# Altium PCB PTx-V2.PcbDoc (part 2 of 2)
Units mil, origin at the board's own origin, x right, y up, seen from the top; angles counter-clockwise.
Board outline 6102.36 x 4488.19 mil, 2 copper layers (Top Layer, Bottom Layer); 123 components, 103 nets, 431 pads, 228 vias.
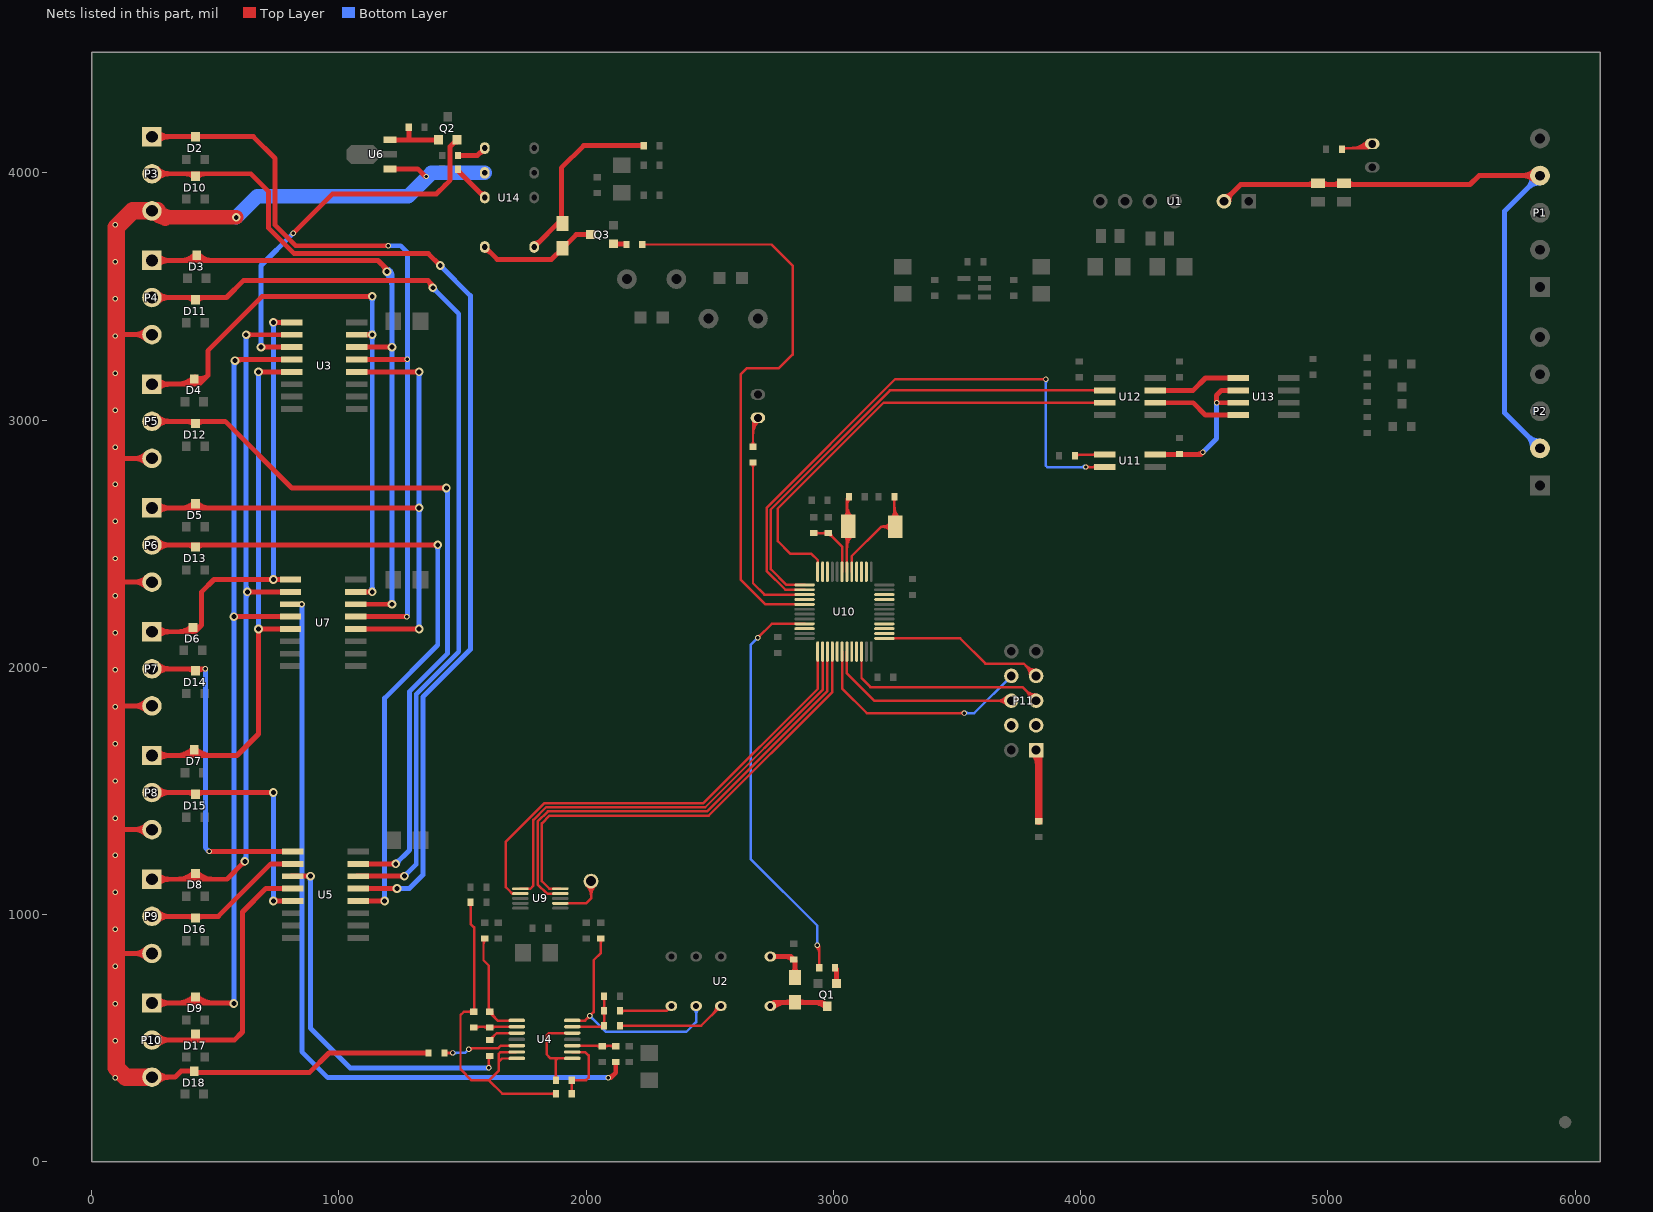
[diagram p2: the nets of this part, all layers, seen from the top]

## Via types
v1: diameter 22, hole 14, Top Layer to Bottom Layer, 185 vias
v2: diameter 35, hole 20, Top Layer to Bottom Layer, 42 vias
v3: diameter 25, hole 15, Top Layer to Bottom Layer, 1 vias

## Nets (pads, with @x,y where several pads share a name; then routed paths per layer and width w, separated by ;. In a path a pad name is that pad's centre, name@x,y a point inside that pad or via, vN(x,y) a via of type N, cw(c..) or ccw(c..) an arc to the next point about the centre after c; other vN are vias at no path point) (continued)
NetC31_1: C31.1 U10.5 XT1.1 | length 711.1
  Top Layer w10: U10.5@3074.53,2386.42 3074.53,2449.53 3194,2569 ; XT1.1@3233.19,2552.14 ccw(c3194,2515.04) 3194,2569 ; XT1.1@3233.19,2585.86 cw(c3194,2622.96) 3194,2569 ; XT1.1@3233.66,2602.09 ccw(c3201.44,2634.31) 3247,2634.31 ; XT1.1@3240.45,2559.01 ccw(c3217.24,2537.04) 3217.24,2569 ccw(c3217.24,2600.96) XT1.1@3240.45,2578.99 ; C31.1@3241.7,2682.2 cw(c3228.89,2669.39) 3247,2669.39 cw(c3265.11,2669.39) C31.1@3252.3,2682.2 ; 3247,2629.48 ccw(c3295.73,2629.48) XT1.1@3261.27,2595.02 ; 3247,2653.62 ccw(c3319.87,2653.62) XT1.1@3268.34,2602.09 ; C31.1@3247,2690 3247,2573 XT1.1@3251,2569 3194,2569
NetC32_1: C32.1 U10.6 XT1.2 | length 634.3
  Top Layer w10: XT1.2@3043.66,2534.94 cw(c3016.65,2507.93) 3054.84,2507.93 ; XT1.2@3043.66,2605.06 ccw(c3016.65,2632.07) 3054.84,2632.07 ; U10.6@3054.84,2386.42 3054.84,2681.84 C32.1@3063,2690 ; 3054.84,2478.2 cw(c3135.08,2478.2) XT1.2@3078.34,2534.94 ; 3054.84,2502.35 cw(c3110.94,2502.35) XT1.2@3071.27,2542.01 ; 3054.84,2637.65 ccw(c3110.94,2637.65) XT1.2@3071.27,2597.99 ; 3054.84,2649.7 cw(c3100.8,2649.7) C32.1@3068.3,2682.2 ; 3054.84,2661.8 ccw(c3135.08,2661.8) XT1.2@3078.34,2605.06 ; 3054.84,2673.84 cw(c3076.66,2673.84) C32.1@3061.23,2689.27
NetD1_A: D1.A Q1.3 U2.12 | length 467.9
  Top Layer w20: U2.12@2745,630 2760,645 D1.A@2845,645 2958.74,645 Q1.3@2975,628.74 ; U2.12@2755.79,623.15 cw(c2808.53,570.41) 2808.53,645 ; D1.A@2834.67,634.67 ccw(c2809.74,609.74) 2809.74,645 ccw(c2809.74,680.26) D1.A@2834.67,655.33 ; D1.A@2855.33,634.67 cw(c2880.26,609.74) 2880.26,645 cw(c2880.26,680.26) D1.A@2855.33,655.33 ; 2919.49,645 cw(c2919.49,574.22) Q1.3@2969.54,624.27
NetD1_K: D1.K R4.1 U2.1 | length 297
  Top Layer w20: U2.1@2745,830 2828,830 R4.1@2840,818 ; U2.1@2755.79,823.15 cw(c2772.32,806.62) 2772.32,830 cw(c2772.32,853.38) U2.1@2755.79,836.85 ; 2802.49,830 cw(c2802.49,782.99) R4.1@2835.73,816.23 ; D1.K@2834.67,760.72 ccw(c2809.74,785.66) 2845,785.66 ccw(c2880.26,785.66) D1.K@2855.33,760.72 ; D1.K@2845,745 R4.1@2845,813
NetD21_A: D21.A Q3.3 U14.12 | length 516.7
  Top Layer w20: U14.12@1590,3686.38 cw(c1590,3653.49) 1613.25,3676.75 ; U14.12@1590,3700 1640,3650 1860,3650 D21.A@1905,3695 1960,3750 Q3.3@2018.74,3750
NetD21_K: D21.K R29.1 U14.1 | length 761.7
  Top Layer w20: U14.1@1790,3700 1900,3810 1900,4020 1990,4110 R29.1@2233,4110 ; U14.1@1790,3713.62 ccw(c1790,3746.51) 1813.25,3723.25
NetLED1_A: LED1.A R21.2 | length 293.1
  Top Layer w10: R21.2@2669.7,2897.3 ccw(c2656.89,2910.11) 2675,2910.11 ccw(c2693.11,2910.11) R21.2@2680.3,2897.3 ; R21.2@2675,2887.76 2675,2988.76 LED1.A@2695,3008.76 ; 2675,2939.28 cw(c2756.61,2939.28) LED1.A@2698.9,2996.98 ; 2675,2963.42 cw(c2732.46,2963.42) LED1.A@2691.83,3004.05 ; 2675,2987.56 cw(c2708.32,2987.56) LED1.A@2684.76,3011.12
NetLED2_A: LED2.A R22.2 | length 330.6
  Top Layer w10: R22.2@5052,4100 5163,4100 LED2.A@5180,4117 ; R22.2@5062.3,4092.2 cw(c5081.14,4073.36) 5081.14,4100 ; 5090.88,4100 ccw(c5090.88,4198.25) LED2.A@5160.35,4128.78 ; 5115.02,4100 ccw(c5115.02,4174.1) LED2.A@5167.42,4121.7 ; 5139.16,4100 ccw(c5139.16,4149.96) LED2.A@5174.49,4114.63
NetQ1_B: Q1.1 R3.2 | length 106.8
  Top Layer w20: R3.2@3005.23,780.73 cw(c2987.92,763.42) 3012.4,763.42 ; Q1.1@3006.95,727.7 ccw(c2993.77,740.87) 3012.4,740.87 ccw(c3031.03,740.87) Q1.1@3017.86,727.7 ; Q1.1@3012.4,721.26 R3.2@3012.4,779.6
NetQ2_B: Q2.1 R9.1 U6.3 | length 274.6
  Top Layer w20: U6.3@1207,4134 1208,4133 1401.86,4133 Q2.1@1402.6,4133.74 ; 1283,4136 R9.1@1283,4185 ; 1383.38,4133 cw(c1383.38,4113.54) Q2.1@1397.14,4127.3 ; 1384.56,4133 ccw(c1384.56,4150.8) Q2.1@1397.14,4138.21
NetQ3_B: Q3.1 R20.2 | length 49.1
  Top Layer w20: Q3.1@2111.26,3712.6 R20.2@2160.4,3712.6
NetR5_2: R5.2 U2.10 | length 525.3
  Top Layer w10: R5.2@2137,550 2465,550 U2.10@2545,630 ; R5.2@2142.3,544.7 cw(c2155.11,531.89) 2155.11,550 cw(c2155.11,568.11) R5.2@2142.3,555.3 ; 2513.21,598.21 ccw(c2481.42,630) U2.10@2526.38,630 ; 2522.71,607.72 cw(c2541.06,589.37) U2.10@2541.06,615.32
NetR6_2: R6.2 U2.8 | length 244.7
  Top Layer w10: R6.2@2137,610 2325,610 U2.8@2345,630 ; R6.2@2142.3,604.7 cw(c2155.11,591.89) 2155.11,610 cw(c2155.11,628.11) R6.2@2142.3,615.3
NetR7_2: R7.2 R8.1 U4.3 | length 258.7
  Top Layer w10: U4.3@1944.2,469.41 R8.1@2117.59,469.41 ; 2038.58,469.41 cw(c2038.58,443.08) R7.2@2057.2,461.7 ; R7.2@2050.21,469.41 ccw(c2050.21,479.29) R7.2@2057.2,472.3 ; R7.2@2072.8,461.7 cw(c2091.42,443.08) 2091.42,469.41 ; R7.2@2072.8,472.3 ccw(c2079.79,479.29) R7.2@2079.79,469.41 ; 2093.58,469.41 cw(c2093.58,443.08) R8.1@2112.2,461.7 ; R8.1@2105.21,469.41 ccw(c2105.21,479.29) R8.1@2112.2,472.3
NetR11_1: R11.1 R13.2 U4.2 | length 374
  Top Layer w10: R11.1@1936.7,282.8 ccw(c1923.89,295.61) 1942,295.61 ccw(c1960.11,295.61) R11.1@1947.3,282.8 ; R13.2@1936.7,322.2 cw(c1923.89,309.39) 1942,309.39 cw(c1960.11,309.39) R13.2@1947.3,322.2 ; R11.1@1942,275 R13.2@1942,330 2000,330 2010,340 2010,430 1996.18,443.82 U4.2@1944.2,443.82 ; R13.2@1947.3,324.7 cw(c1960.11,311.89) 1960.11,330 cw(c1960.11,348.11) R13.2@1947.3,335.3
NetR13_1: R13.1 U4.1 U4.5 | length 413.9
  Top Layer w10: R13.1@1872.7,337.8 ccw(c1859.89,350.61) 1878,350.61 ccw(c1896.11,350.61) R13.1@1883.3,337.8 ; R13.1@1878,330 1878,412.23 1884,418.23 ; U4.1@1944.2,418.23 1856.77,418.23 1840,435 1840,510 1850.59,520.59 U4.5@1944.2,520.59
NetR14_1: R14.1 U4.10 | length 150.1
  Top Layer w10: R14.1@1610,492 1638.59,520.59 U4.10@1719.8,520.59 ; R14.1@1612.5,499.5 ccw(c1612.5,511.57) R14.1@1621.04,503.04 ; R14.1@1620,492 cw(c1644.14,492) 1627.07,509.07
NetR15_1: R15.1 R17.2 U4.8 | length 503.2
  Top Layer w10: 1585,878.86 cw(c1611.64,878.86) R15.1@1592.8,897.7 ; R15.1@1585,903 1585,815 1607,793 1607,606.41 1642.23,571.18 U4.8@1714.8,571.18 ; R17.2@1602.2,612.3 ccw(c1590.6,623.9) 1607,623.9 ; 1607,626.31 ccw(c1626.81,626.31) R17.2@1612.8,612.3 ; R17.2@1620,607 ccw(c1652.81,607) 1629.61,583.8
NetR16_1: R16.1 R17.1 U4.9 | length 239.9
  Top Layer w10: R16.1@1548.18,546.18 U4.9@1719.8,546.18 ; R16.1@1552.8,537.7 cw(c1573.29,517.21) 1573.29,546.18 ; 1581.71,546.18 cw(c1581.71,517.21) R17.1@1602.2,537.7 ; R17.1@1617.8,537.7 cw(c1638.29,517.21) 1638.29,546.18
NetR18_1: R18.1 U4.12 | length 403.7
  Top Layer w10: R18.1@1427,440 v1(1460,440) ; R18.1@1432.3,434.7 cw(c1445.11,421.89) 1445.11,440 cw(c1445.11,458.11) R18.1@1432.3,445.3 ; v1@1455.76,435.76 ccw(c1445.51,425.51) 1445.51,440 ccw(c1445.51,454.49) v1@1455.76,444.24 ; v1(1525,455) 1530,460 1645,460 1654.41,469.41 U4.12@1719.8,469.41 ; v1@1529.24,450.76 cw(c1551.56,428.44) 1551.56,460
  Bottom Layer w10: v1(1460,440) 1510,440 v1(1525,455) ; v1@1464.24,435.76 cw(c1474.49,425.51) 1474.49,440 cw(c1474.49,454.49) v1@1464.24,444.24
NetR24_1: R24.1 U11.4 U13.2 U13.3 | length 687.4
  Top Layer w20: U11.4@4302.36,2860 4485,2860 v1(4495,2870) ; 4384.22,2860 ccw(c4384.22,2876.28) R24.1@4395.73,2864.77 ; R24.1@4404.27,2864.77 ccw(c4415.78,2876.28) 4415.78,2860 ; 4468.44,2860 ccw(c4468.44,2896.56) v1@4494.29,2870.71 ; U13.3@4637.64,3070 v1(4550,3070) 4550,3100 4570,3120 U13.2@4637.64,3120
  Bottom Layer w20: v1(4495,2870) 4550,2925 v1(4550,3070)
NetR25_1: R25.1 U11.1 | length 169.5
  Top Layer w10: R25.1@3977,2855 3982,2860 U11.1@4097.64,2860 ; R25.1@3982.3,2852.2 cw(c4001.14,2833.36) 4001.14,2860 ; U11.1@4061.33,2855.18 ccw(c4049.7,2843.56) 4049.7,2860 ccw(c4049.7,2876.44) U11.1@4061.33,2864.82
NetR30_2: R30.2 U14.10 | length 198.8
  Top Layer w20: R30.2@1482,4015 1482,4008 U14.10@1590,3900 ; R30.2@1484.5,4012.5 ccw(c1501.4,4012.5) R30.2@1489.45,4000.55 ; 1566.75,3923.25 ccw(c1590,3946.51) U14.10@1590,3913.62
NetR31_2: R31.2 U14.8 | length 146.3
  Top Layer w20: R31.2@1482,4070 1560,4070 U14.8@1590,4100 ; 1566.75,4076.75 cw(c1590,4053.49) U14.8@1590,4086.38
NetT2_1: T2.1 U9.7 | length 354.4
  Top Layer w10: U9.7@1895.71,1045.32 1999.69,1045.32 2000,1045 2020,1065 T2.1@2020,1135 ; T2.1@2002.32,1117.32 cw(c1959.64,1074.64) 2020,1074.64 cw(c2080.36,1074.64) T2.1@2037.68,1117.32 ; T2.1@2009.39,1124.39 cw(c1983.79,1098.79) 2020,1098.79 cw(c2056.21,1098.79) T2.1@2030.61,1124.39
NetU12_6: U12.6 U13.4 | length 356
  Top Layer w20: U12.6@4302.36,3070 4455,3070 4505,3020 U13.4@4637.64,3020
NetU12_7: U12.7 U13.1 | length 356
  Top Layer w20: U12.7@4302.36,3120 4455,3120 4505,3170 4565,3170 U13.1@4637.64,3170
PA0: U10.10
PA1: U10.11
PA2: U10.12 U12.3 | length 1898.1
  Top Layer w10: U10.12@2936.73,2386.42 2936.73,2433.27 2910,2460 2825,2460 2775,2510 2775,2641.92 3203.08,3070 U12.3@4097.64,3070 ; U12.3@4061.33,3065.18 ccw(c4049.7,3053.56) 4049.7,3070 ccw(c4049.7,3086.44) U12.3@4061.33,3074.82
PA3: U10.13 U12.2 | length 1980.1
  Top Layer w10: U10.13@2883.58,2333.27 2810.77,2333.27 2747,2397.04 2747,2637.96 3229.04,3120 U12.2@4097.64,3120 ; U12.2@4061.33,3115.18 ccw(c4049.7,3103.56) 4049.7,3120 ccw(c4049.7,3136.44) U12.2@4061.33,3124.82
PA4: U10.14 U11.2 | length 2492.2
  Top Layer w10: U10.14@2883.58,2313.58 2806.42,2313.58 2730,2390 2730,2645 3250,3165 v1(3860,3165) ; v1@3855.76,3160.76 ccw(c3845.51,3150.51) 3845.51,3165 ccw(c3845.51,3179.49) v1@3855.76,3169.24 ; v1(4020,2810) U11.2@4097.64,2810 ; v1@4024.24,2805.76 cw(c4034.49,2795.51) 4034.49,2810 cw(c4034.49,2824.49) v1@4024.24,2814.24 ; U11.2@4061.33,2805.18 ccw(c4049.7,2793.56) 4049.7,2810 ccw(c4049.7,2826.44) U11.2@4061.33,2814.82
  Bottom Layer w10: v1@3855.76,3160.76 cw(c3845.51,3150.51) 3860,3150.51 cw(c3874.49,3150.51) v1@3864.24,3160.76 ; v1(3860,3165) 3860,2860 3860,2815 3865,2810 v1(4020,2810) ; v1@4015.76,2805.76 ccw(c4005.51,2795.51) 4005.51,2810 ccw(c4005.51,2824.49) v1@4015.76,2814.24
PA5: R21.1 U10.15 | length 739.9
  Top Layer w10: R21.1@2669.7,2822.7 cw(c2656.89,2809.89) 2675,2809.89 cw(c2693.11,2809.89) R21.1@2680.3,2822.7 ; R21.1@2675,2823.76 2675,2340 2721.1,2293.9 U10.15@2883.58,2293.9
PA6: U10.16
PA7: R20.1 U10.17 | length 2376.8
  Top Layer w10: R20.1@2227,3710 2750,3710 2835,3625 2835,3265 2780,3210 2650,3210 2625,3185 2625,2354.53 2725,2254.53 U10.17@2883.58,2254.53
PA8: U10.29
PA9: P11.8 U10.30 | length 982.6
  Top Layer w10: U10.30@3035.16,2063.58 3035.16,1914.84 3135,1815 v1(3530,1815) ; v1@3525.76,1810.76 ccw(c3515.51,1800.51) 3515.51,1815 ccw(c3515.51,1829.49) v1@3525.76,1819.24
  Bottom Layer w10: v1(3530,1815) 3570,1815 P11.8@3720,1965 ; v1@3534.24,1810.76 cw(c3544.49,1800.51) 3544.49,1815 cw(c3544.49,1829.49) v1@3534.24,1819.24
PA10: P11.6 U10.31 | length 947.3
  Top Layer w10: U10.31@3054.84,2063.58 3054.84,1975.16 3165,1865 P11.6@3720,1865 ; P11.6@3702.66,1847.66 ccw(c3660.79,1805.79) 3660.79,1865 ccw(c3660.79,1924.21) P11.6@3702.66,1882.34 ; P11.6@3709.73,1854.73 ccw(c3684.93,1829.93) 3684.93,1865 ccw(c3684.93,1900.07) P11.6@3709.73,1875.27
PA11: U10.32
PA12: U10.33
PA13: P11.5 U10.34 | length 999.4
  Top Layer w10: U10.34@3113.9,2063.58 3113.9,1956.1 3150,1920 3765,1920 P11.5@3820,1865 ; P11.5@3795.47,1865 ccw(c3736.26,1865) 3778.13,1906.87 ccw(c3820,1948.74) P11.5@3820,1889.53 ; P11.5@3805.47,1865 ccw(c3770.4,1865) 3795.2,1889.8 ccw(c3820,1914.6) P11.5@3820,1879.53
PA14: P11.7 U10.37 | length 824.5
  Top Layer w10: U10.37@3206.42,2116.73 3513.27,2116.73 3615,2015 3770,2015 P11.7@3820,1965 ; P11.7@3795.47,1965 ccw(c3736.26,1965) 3778.13,2006.87 ccw(c3820,2048.74) P11.7@3820,1989.53 ; P11.7@3805.47,1965 ccw(c3770.4,1965) 3795.2,1989.8 ccw(c3820,2014.6) P11.7@3820,1979.53
PA15: U10.38
PB3: U10.39
PB4: U10.40
PB8: U10.45
PB9: U10.46
PB10: R3.1 U10.21 | length 1817.7
  Top Layer w10: v1(2695,2120) 2750.79,2175.79 U10.21@2883.58,2175.79 ; v1@2695,2126 ccw(c2695,2140.49) 2705.24,2130.24 ccw(c2715.49,2120) v1@2701,2120 ; v1@2930.76,870.76 cw(c2901.2,841.2) 2943,841.2 ; v1(2935,875) 2943,867 R3.1@2943,785 ; R3.1@2937.7,792.8 ccw(c2924.89,805.61) 2943,805.61 ccw(c2961.11,805.61) R3.1@2948.3,792.8 ; v1@2937.83,877.83 cw(c2925.34,865.34) 2943,865.34
  Bottom Layer w10: v1@2689,2120 cw(c2674.51,2120) 2684.76,2109.76 cw(c2695,2099.51) v1@2695,2114 ; v1(2695,2120) 2665,2090 2665,1225 2935,955 v1(2935,875) ; v1@2930.76,879.24 ccw(c2920.51,889.49) 2935,889.49 ccw(c2949.49,889.49) v1@2939.24,879.24
PB11: U10.22
PB12: U9.2 U10.25 | length 1934.8
  Top Layer w10: 1695.56,1090.22 ccw(c1706.73,1101.39) U9.2@1706.73,1085.59 ; U9.2@1734.29,1084.69 1701.1,1084.69 1675.31,1110.47 1675.31,1295.31 1831,1451 2474.79,1451 2936.73,1912.94 U10.25@2936.73,2063.58
PB13: U9.1 U10.26 | length 1866
  Top Layer w10: U9.1@1734.29,1104.37 1774.37,1104.37 1787,1117 1787,1382.96 1838.04,1434 2481.83,1434 2956.42,1908.58 U10.26@2956.42,2063.58
PB14: U9.9 U10.27 | length 1911.4
  Top Layer w10: U9.9@1895.71,1084.69 1841.27,1084.69 1804,1121.96 1804,1375.92 1845.08,1417 2488.88,1417 2976.1,1904.23 U10.27@2976.1,2063.58
PB15: U9.10 U10.28 | length 1879.9
  Top Layer w10: U9.10@1895.71,1104.37 1851.26,1104.37 1821,1134.63 1821,1368.88 1852.12,1400 2495.92,1400 2995.79,1899.87 U10.28@2995.79,2063.58
PC13: U10.2
PC14: U10.3
PC15: U10.4
PGND: C5.2 C6.2 P1.4 P2.2 U1.2 | length 3085.4
  Top Layer w20: U1.2@4580,3885 4647.4,3952.4 4880,3952.4 5575.24,3952.4 5611.42,3988.58 P1.4@5858.27,3988.58 ; U1.2@4580,3904.53 ccw(c4580,3951.67) 4613.34,3918.34 ccw(c4646.67,3885) U1.2@4599.53,3885 ; 4915.69,3952.4 ccw(c4915.69,3992.85) C6.2@4944.29,3964.25 ; C6.2@4975.71,3964.25 ccw(c5004.31,3992.85) 5004.31,3952.4 ; 5020.69,3952.4 ccw(c5020.69,3992.85) C5.2@5049.29,3964.25 ; C5.2@5080.71,3964.25 ccw(c5109.31,3992.85) 5109.31,3952.4 ; P1.4@5837.05,3967.37 ccw(c5785.84,3916.16) 5785.84,3988.58 ccw(c5785.84,4061.01) P1.4@5837.05,4009.8
  Bottom Layer w20: P2.2@5828.27,2885.43 ccw(c5755.84,2885.43) 5807.05,2936.65 ccw(c5858.27,2987.86) P2.2@5858.27,2915.43 ; P1.4@5828.27,3988.58 cw(c5755.84,3988.58) 5807.05,3937.37 cw(c5858.27,3886.16) P1.4@5858.27,3958.58 ; P2.2@5858.27,2885.43 5715,3028.7 5715,3845.31 P1.4@5858.27,3988.58
PT0_B1: D10.3 P3.2 U5.13 | length 4587.1
  Top Layer w20: P3.2@250,3996.06 643.94,3996.06 715,3925 715,3777.22 819.22,3673 1362,3673 v2(1410,3625) ; P3.2@264.86,3975.3 cw(c315,3925.16) 315,3996.06 cw(c315,4066.97) P3.2@264.86,4016.83 ; 380.08,3996.06 cw(c380.08,3947.33) D10.3@414.54,3981.79 ; D10.3@425.46,3981.79 cw(c459.92,3947.33) 459.92,3996.06 ; U5.13@1072.73,1105 v2(1235,1105) ; v2@1229.7,1099.7 ccw(c1216.89,1086.89) 1216.89,1105 ccw(c1216.89,1123.11) v2@1229.7,1110.3 ; v2@1402.5,3625 ccw(c1384.39,3625) 1397.2,3637.8 ccw(c1410,3650.61) v2@1410,3632.5
  Bottom Layer w20: v2(1235,1105) 1285,1105 1340,1160 1340,1880 1532,2072 1532,3503 v2(1410,3625) ; v2@1240.3,1099.7 cw(c1253.11,1086.89) 1253.11,1105 cw(c1253.11,1123.11) v2@1240.3,1110.3 ; v2@1410,3617.5 cw(c1410,3599.39) 1422.8,3612.2 cw(c1435.61,3625) v2@1417.5,3625
PT0_R: D2.3 P3.1 U3.13 U7.13 | length 3428.4
  Top Layer w20: P3.1@250,4146.06 653.94,4146.06 742,4058 742,3788.4 825.4,3705 v1(1200,3705) ; P3.1@264.86,4125.3 cw(c315,4075.16) 315,4146.06 cw(c315,4216.97) P3.1@264.86,4166.83 ; 400.89,4146.06 ccw(c400.89,4165.37) D2.3@414.54,4151.72 ; 401.85,4146.06 cw(c401.85,4128.11) D2.3@414.54,4140.8 ; D2.3@425.46,4140.8 cw(c438.15,4128.11) 438.15,4146.06 ; D2.3@425.46,4151.72 ccw(c439.11,4165.37) 439.11,4146.06 ; U7.13@1072.73,2205 v1(1275,2205) ; U3.13@1072.73,3245 v1(1277.13,3245)
  Bottom Layer w20: v1(1200,3705) 1250,3705 1277.13,3677.87 v1@1277.13,2205
PT1_B1: D11.3 P4.2 U5.14 | length 4187.4
  Top Layer w20: P4.2@250,3495.5 545.5,3495.5 615,3565 1360,3565 1380,3545 v2(1380,3535) ; P4.2@264.86,3474.73 cw(c315,3424.59) 315,3495.5 cw(c315,3566.41) P4.2@264.86,3516.27 ; 381.44,3495.5 cw(c381.44,3448.68) D11.3@414.54,3481.79 ; D11.3@425.46,3481.79 cw(c458.56,3448.68) 458.56,3495.5 ; U5.14@1072.73,1155 v2(1265,1155) ; v2@1259.7,1149.7 ccw(c1246.89,1136.89) 1246.89,1155 ccw(c1246.89,1173.11) v2@1259.7,1160.3 ; 1360.13,3564.87 cw(c1330.25,3535) v2@1372.5,3535
  Bottom Layer w20: v2(1265,1155) 1313,1203 1313,1891.18 1485,2063.18 1485,3430 v2(1380,3535) ; v2@1265,1162.5 ccw(c1265,1180.61) 1277.8,1167.8 ccw(c1290.61,1155) v2@1272.5,1155 ; v2@1380,3527.5 cw(c1380,3509.39) 1392.8,3522.2 cw(c1405.61,3535) v2@1387.5,3535
PT1_R: D3.3 P4.1 U3.14 U7.14 | length 3187.3
  Top Layer w20: P4.1@250,3645.5 1158.47,3645.5 1195,3608.98 v2(1195,3600) ; P4.1@264.86,3624.73 cw(c315,3574.59) 315,3645.5 cw(c315,3716.41) P4.1@264.86,3666.27 ; 358.63,3645.5 ccw(c358.63,3731.65) D3.3@419.54,3670.73 ; 406.91,3645.5 ccw(c406.91,3683.36) D3.3@433.69,3656.59 ; D3.3@416.31,3656.59 ccw(c443.09,3683.36) 443.09,3645.5 ; D3.3@430.46,3670.73 ccw(c491.37,3731.65) 491.37,3645.5 ; U7.14@1072.73,2255 v2(1215,2255) ; U3.14@1072.73,3295 v2(1215,3295) ; 1175.85,3628.12 cw(c1147.73,3600) v2@1187.5,3600 ; v2@1209.7,2249.7 ccw(c1196.89,2236.89) 1196.89,2255 ccw(c1196.89,2273.11) v2@1209.7,2260.3 ; v2@1209.7,3289.7 ccw(c1196.89,3276.89) 1196.89,3295 ccw(c1196.89,3313.11) v2@1209.7,3300.3
  Bottom Layer w20: v2@1189.7,3594.7 cw(c1128.61,3533.61) 1215,3533.61 ; v2(1195,3600) 1200,3600 1215,3585 v2(1215,2255) ; v2@1203.84,3608.84 cw(c1176.89,3581.89) 1215,3581.89 ; v2@1209.7,2260.3 ccw(c1196.89,2273.11) 1215,2273.11 ccw(c1233.11,2273.11) v2@1220.3,2260.3 ; v2@1209.7,3289.7 cw(c1196.89,3276.89) 1215,3276.89 cw(c1233.11,3276.89) v2@1220.3,3289.7 ; v2@1209.7,3300.3 ccw(c1196.89,3313.11) 1215,3313.11 ccw(c1233.11,3313.11) v2@1220.3,3300.3
PT2_B1: D12.3 P5.2 U5.15 | length 3358
  Top Layer w20: P5.2@250,2994.94 540.06,2994.94 810,2725 v2(1435,2725) ; P5.2@264.86,2974.17 cw(c315,2924.03) 315,2994.94 cw(c315,3065.84) P5.2@264.86,3015.71 ; 382.8,2994.94 cw(c382.8,2950.04) D12.3@414.54,2981.79 ; D12.3@425.46,2981.79 cw(c457.2,2950.04) 457.2,2994.94 ; U5.15@1072.73,1205 v2(1230,1205) ; v2@1224.7,1199.7 ccw(c1211.89,1186.89) 1211.89,1205 ccw(c1211.89,1223.11) v2@1224.7,1210.3 ; v2@1429.7,2719.7 ccw(c1416.89,2706.89) 1416.89,2725 ccw(c1416.89,2743.11) v2@1429.7,2730.3
  Bottom Layer w20: v2(1230,1205) 1286,1261 1286,1902.37 1440,2056.37 1440,2720 v2(1435,2725) ; v2@1230,1212.5 ccw(c1230,1230.61) 1242.8,1217.8 ccw(c1255.61,1205) v2@1237.5,1205 ; v2@1429.7,2719.7 cw(c1404.82,2694.82) 1440,2694.82
PT2_R: D4.3 P5.1 U3.15 U7.15 | length 2923.5
  Top Layer w20: P5.1@250,3144.94 434.94,3144.94 470,3180 ; P5.1@264.86,3124.17 cw(c315,3074.03) 315,3144.94 cw(c315,3215.84) P5.1@264.86,3165.71 ; 347.27,3144.94 ccw(c347.27,3233) D4.3@409.54,3170.73 ; 395.56,3144.94 ccw(c395.56,3184.72) D4.3@423.69,3156.59 ; D4.3@408.63,3156.74 ccw(c426.97,3186.98) 451.97,3161.97 ; D4.3@419,3173.84 ccw(c440.58,3209.42) 470,3180 ; U7.15@1072.73,2305 v2(1135,2305) ; U3.15@1072.73,3345 v2(1135,3345) ; v2@1129.7,2299.7 ccw(c1116.89,2286.89) 1116.89,2305 ccw(c1116.89,2323.11) v2@1129.7,2310.3 ; v2@1129.7,3339.7 ccw(c1116.89,3326.89) 1116.89,3345 ccw(c1116.89,3363.11) v2@1129.7,3350.3 ; v2@1129.7,3494.7 ccw(c1116.89,3481.89) 1116.89,3500 ccw(c1116.89,3518.11) v2@1129.7,3505.3 ; v2(1135,3500) 690,3500 470,3280 470,3180
  Bottom Layer w20: v2@1129.7,2310.3 ccw(c1116.89,2323.11) 1135,2323.11 ccw(c1153.11,2323.11) v2@1140.3,2310.3 ; v2@1129.7,3339.7 cw(c1116.89,3326.89) 1135,3326.89 cw(c1153.11,3326.89) v2@1140.3,3339.7 ; v2@1129.7,3350.3 ccw(c1116.89,3363.11) 1135,3363.11 ccw(c1153.11,3363.11) v2@1140.3,3350.3 ; v2@1129.7,3494.7 cw(c1116.89,3481.89) 1135,3481.89 cw(c1153.11,3481.89) v2@1140.3,3494.7 ; v2(1135,2305) v2(1135,3345) v2(1135,3500)
PT3_B1: D13.3 P6.2 U5.12 | length 3071.7
  Top Layer w20: P6.2@250,2494.38 1399.38,2494.38 v2(1400,2495) ; P6.2@264.86,2473.61 cw(c315,2423.47) 315,2494.38 cw(c315,2565.28) P6.2@264.86,2515.14 ; 384.15,2494.38 cw(c384.15,2451.4) D13.3@414.54,2481.79 ; D13.3@425.46,2481.79 cw(c455.85,2451.4) 455.85,2494.38 ; U5.12@1072.73,1055 v2(1185,1055) ; v2@1179.7,1049.7 ccw(c1166.89,1036.89) 1166.89,1055 ccw(c1166.89,1073.11) v2@1179.7,1060.3 ; 1380.39,2494.38 ccw(c1380.39,2514.61) v2@1394.7,2500.3
  Bottom Layer w20: v2@1179.7,1060.3 ccw(c1166.89,1073.11) 1185,1073.11 ccw(c1203.11,1073.11) v2@1190.3,1060.3 ; v2(1185,1055) 1185,1875 1400,2090 v2(1400,2495) ; v2@1394.7,2489.7 cw(c1381.89,2476.89) 1400,2476.89 cw(c1418.11,2476.89) v2@1405.3,2489.7
PT3_R: D5.3 P6.1 U3.12 U7.12 | length 3070.9
  Top Layer w20: P6.1@250,2644.38 1324.38,2644.38 v2(1325,2645) ; P6.1@264.86,2623.61 cw(c315,2573.47) 315,2644.38 cw(c315,2715.28) P6.1@264.86,2665.14 ; 362.98,2644.38 ccw(c362.98,2717.29) D5.3@414.54,2665.73 ; D5.3@411.27,2644.38 ccw(c411.27,2669.01) D5.3@428.69,2651.59 ; D5.3@411.31,2651.59 ccw(c428.73,2669.01) D5.3@428.73,2644.38 ; D5.3@425.46,2665.73 ccw(c477.02,2717.29) 477.02,2644.38 ; U7.12@1072.73,2155 v2(1325,2155) ; U3.12@1072.73,3195 v2(1325,3195) ; 1305.39,2644.38 ccw(c1305.39,2664.61) v2@1319.7,2650.3 ; v2@1319.7,2149.7 ccw(c1306.89,2136.89) 1306.89,2155 ccw(c1306.89,2173.11) v2@1319.7,2160.3 ; v2@1319.7,3189.7 ccw(c1306.89,3176.89) 1306.89,3195 ccw(c1306.89,3213.11) v2@1319.7,3200.3
  Bottom Layer w20: v2@1319.7,2160.3 ccw(c1306.89,2173.11) 1325,2173.11 ccw(c1343.11,2173.11) v2@1330.3,2160.3 ; v2@1319.7,2639.7 cw(c1306.89,2626.89) 1325,2626.89 cw(c1343.11,2626.89) v2@1330.3,2639.7 ; v2@1319.7,2650.3 ccw(c1306.89,2663.11) 1325,2663.11 ccw(c1343.11,2663.11) v2@1330.3,2650.3 ; v2@1319.7,3189.7 cw(c1306.89,3176.89) 1325,3176.89 cw(c1343.11,3176.89) v2@1330.3,3189.7 ; v2(1325,2155) v2(1325,2645) v2(1325,3195)
PT4_B1: D14.3 P7.2 U5.1 | length 1879
  Top Layer w20: P7.2@250,1993.81 v1(460,1993.81) ; P7.2@264.86,1973.05 cw(c315,1922.91) 315,1993.81 cw(c315,2064.72) P7.2@264.86,2014.58 ; 385.51,1993.81 cw(c385.51,1952.76) D14.3@414.54,1981.79 ; D14.3@425.46,1981.79 cw(c454.49,1952.76) v1@454.49,1993.81 ; v1(475,1255) U5.1@809.27,1255
  Bottom Layer w20: 460,1580 v1(460,1993.81) 460,1270 v1(475,1255)
PT4_R: D6.3 P7.1 U3.1 U7.1 | length 2235.8
  Top Layer w20: P7.1@250,2143.81 418.81,2143.81 445,2170 ; P7.1@264.86,2123.05 cw(c315,2072.91) 315,2143.81 cw(c315,2214.72) P7.1@264.86,2164.58 ; 351.63,2143.81 ccw(c351.63,2218.65) D6.3@404.54,2165.73 ; D6.3@399.91,2143.81 ccw(c399.91,2170.36) D6.3@418.69,2151.59 ; D6.3@402.35,2152.63 ccw(c414.9,2168.41) 429.15,2154.15 ; D6.3@414.8,2168.28 ccw(c428.94,2186.06) 445,2170 ; v2@729.7,2349.7 ccw(c716.89,2336.89) 716.89,2355 ccw(c716.89,2373.11) v2@729.7,2360.3 ; v2(735,3395) U3.1@809.27,3395 ; v2@740.3,2349.7 cw(c753.11,2336.89) 753.11,2355 cw(c753.11,2373.11) v2@740.3,2360.3 ; v2@740.3,3389.7 cw(c753.11,3376.89) 753.11,3395 cw(c753.11,3413.11) v2@740.3,3400.3 ; U7.1@809.27,2355 495,2355 445,2305 445,2170
  Bottom Layer w20: v2@729.7,2360.3 ccw(c716.89,2373.11) 735,2373.11 ccw(c753.11,2373.11) v2@740.3,2360.3 ; v2@729.7,3389.7 cw(c716.89,3376.89) 735,3376.89 cw(c753.11,3376.89) v2@740.3,3389.7 ; v2(735,2355) v2(735,3395)
PT5_B1: D15.3 P8.2 U5.5 | length 1284.1
  Top Layer w20: P8.2@250,1493.25 v2(735,1493.25) ; P8.2@264.86,1472.48 cw(c315,1422.35) 315,1493.25 cw(c315,1564.16) P8.2@264.86,1514.02 ; 386.87,1493.25 cw(c386.87,1454.11) D15.3@414.54,1481.79 ; D15.3@425.46,1481.79 cw(c453.13,1454.11) 453.13,1493.25 ; v2@729.7,1487.95 ccw(c716.89,1475.14) 716.89,1493.25 ccw(c716.89,1511.36) v2@729.7,1498.55 ; v2(735,1055) U5.5@809.27,1055 ; v2@740.3,1049.7 cw(c753.11,1036.89) 753.11,1055 cw(c753.11,1073.11) v2@740.3,1060.3
  Bottom Layer w20: v2@729.7,1060.3 ccw(c716.89,1073.11) 735,1073.11 ccw(c753.11,1073.11) v2@740.3,1060.3 ; v2@729.7,1487.95 cw(c716.89,1475.14) 735,1475.14 cw(c753.11,1475.14) v2@740.3,1487.95 ; v2(735,1055) v2(735,1493.25)
PT5_R: D7.3 P8.1 U3.5 U7.5 | length 2667
  Top Layer w20: P8.1@250,1643.25 588.25,1643.25 675,1730 v2(675,2155) U7.5@809.27,2155 ; P8.1@264.86,1622.48 cw(c315,1572.35) 315,1643.25 cw(c315,1714.16) P8.1@264.86,1664.02 ; 343.2,1643.25 ccw(c343.2,1737.08) D7.3@409.54,1670.73 ; 391.48,1643.25 ccw(c391.48,1688.79) D7.3@423.69,1656.59 ; D7.3@406.31,1656.59 ccw(c438.52,1688.79) 438.52,1643.25 ; D7.3@420.46,1670.73 ccw(c486.8,1737.08) 486.8,1643.25 ; v2@669.7,2149.7 cw(c656.89,2136.89) 675,2136.89 cw(c693.11,2136.89) 680.3,2149.7 cw(c693.11,2136.89) 693.11,2155 cw(c693.11,2173.11) v2@680.3,2160.3 ; v2(675,3195) U3.5@809.27,3195 ; v2@680.3,3189.7 cw(c693.11,3176.89) 693.11,3195 cw(c693.11,3213.11) v2@680.3,3200.3
  Bottom Layer w20: v2@669.7,2160.3 ccw(c656.89,2173.11) 675,2173.11 ccw(c693.11,2173.11) v2@680.3,2160.3 ; v2@669.7,3189.7 cw(c656.89,3176.89) 675,3176.89 cw(c693.11,3176.89) v2@680.3,3189.7 ; v2(675,2155) v2(675,3195)
PT6_B1: D16.3 P9.2 U5.2 | length 817
  Top Layer w20: P9.2@250,992.69 512.69,992.69 725,1205 U5.2@809.27,1205 ; P9.2@264.86,971.92 cw(c315,921.78) 315,992.69 cw(c315,1063.59) P9.2@264.86,1013.46 ; 388.23,992.69 cw(c388.23,955.47) D16.3@414.54,981.79 ; D16.3@425.46,981.79 cw(c451.77,955.47) 451.77,992.69
PT6_R: D8.3 P9.1 U3.2 U7.2 | length 3428.5
  Top Layer w20: P9.1@250,1142.69 547.69,1142.69 v2(620,1215) ; P9.1@264.86,1121.92 cw(c315,1071.78) 315,1142.69 cw(c315,1213.59) P9.1@264.86,1163.46 ; 346.84,1142.69 ccw(c346.84,1238.44) D8.3@414.54,1170.73 ; 395.12,1142.69 ccw(c395.12,1190.15) D8.3@428.69,1156.59 ; D8.3@411.31,1156.59 ccw(c444.88,1190.15) 444.88,1142.69 ; D8.3@425.46,1170.73 ccw(c493.16,1238.44) 493.16,1142.69 ; v2@612.5,1215 cw(c594.39,1215) 607.2,1202.2 cw(c620,1189.39) v2@620,1207.5 ; v2(625,3345) U3.2@809.27,3345 ; v2(630,2305) U7.2@809.27,2305 ; v2@630.3,3339.7 cw(c643.11,3326.89) 643.11,3345 cw(c643.11,3363.11) v2@630.3,3350.3 ; v2@635.3,2299.7 cw(c648.11,2286.89) 648.11,2305 cw(c648.11,2323.11) v2@635.3,2310.3
  Bottom Layer w20: v2@614.7,1220.3 ccw(c589.82,1245.18) 625,1245.18 ; v2@619.7,3339.7 cw(c606.89,3326.89) 625,3326.89 cw(c643.11,3326.89) v2@630.3,3339.7 ; v2(620,1215) 625,1220 v2(625,3345) ; 625,2274.82 cw(c660.18,2274.82) v2@635.3,2299.7 ; 625,2335.18 ccw(c660.18,2335.18) v2@635.3,2310.3
PT7_B1: D17.3 P10.2 U5.4 | length 1208.6
  Top Layer w20: P10.2@250,492.13 345,492.13 577.13,492.13 610,525 610,1010 705,1105 U5.4@809.27,1105 ; P10.2@264.86,471.36 cw(c315,421.22) 315,492.13 cw(c315,563.03) P10.2@264.86,512.89
PT7_R: D9.3 P10.1 U3.4 U7.4 | length 3924.9
  Top Layer w20: P10.1@250,642.13 572.87,642.13 v2(575,640) ; P10.1@264.86,621.36 cw(c315,571.22) 315,642.13 cw(c315,713.03) P10.1@264.86,662.89 ; 345.48,642.13 ccw(c345.48,739.79) D9.3@414.54,670.73 ; 393.77,642.13 ccw(c393.77,691.51) D9.3@428.69,656.59 ; D9.3@411.31,656.59 ccw(c446.23,691.51) 446.23,642.13 ; D9.3@425.46,670.73 ccw(c494.52,739.79) 494.52,642.13 ; 551.76,642.13 cw(c551.76,616.76) v2@569.7,634.7 ; v2(575,2205) U7.4@809.27,2205 ; v2(580,3240) 585,3245 U3.4@809.27,3245 ; v2@580.3,2199.7 cw(c593.11,2186.89) 593.11,2205 cw(c593.11,2223.11) v2@580.3,2210.3 ; v2@585.3,3234.7 cw(c610.18,3209.82) 610.18,3245
  Bottom Layer w20: v2@569.7,645.3 ccw(c556.89,658.11) 575,658.11 ccw(c593.11,658.11) v2@580.3,645.3 ; v2@569.7,2199.7 cw(c556.89,2186.89) 575,2186.89 cw(c593.11,2186.89) v2@580.3,2199.7 ; v2@569.7,2210.3 ccw(c556.89,2223.11) 575,2223.11 ccw(c593.11,2223.11) v2@580.3,2210.3 ; v2(575,640) 575,3235 v2(580,3240) ; 575,3209.82 cw(c610.18,3209.82) v2@585.3,3234.7
PTX_B1: R14.2 U5.3 | length 1630.3
  Top Layer w10: R14.2@1602.2,422.7 cw(c1590.6,411.1) 1607,411.1 ; v1@1602.76,383.65 ccw(c1592.51,393.89) 1607,393.89 ccw(c1621.49,393.89) v1@1611.24,383.65 ; v1(1607,379.41) R14.2@1607,422.41 ; 1607,408.69 cw(c1626.81,408.69) R14.2@1612.8,422.7
  Top Layer w20: U5.3@809.27,1155 v2(885,1155) ; v2@879.7,1149.7 ccw(c866.89,1136.89) 866.89,1155 ccw(c866.89,1173.11) v2@879.7,1160.3
  Bottom Layer w20: v2@879.7,1149.7 cw(c866.89,1136.89) 885,1136.89 cw(c903.11,1136.89) v2@890.3,1149.7 ; v2(885,1155) 885,540 1045.59,379.41 v1(1607,379.41)
PTX_B2: D18.3 P3.3 P4.3 P5.3 P6.3 P7.3 P8.3 P9.3 P10.3 R18.2 U6.1 U14.9 | length 8169.2
  Top Layer w20: 130.06,2844.94 P5.3@244.09,2844.94 P5.3@250,2844.94 ; 130.62,2344.38 P6.3@244.09,2344.38 P6.3@250,2344.38 ; 131.19,1843.81 P7.3@244.09,1843.81 P7.3@250,1843.81 ; 131.75,1343.25 P8.3@244.09,1343.25 P8.3@250,1343.25 ; 132.31,842.69 P9.3@244.09,842.69 P9.3@250,842.69 ; 134.5,3345.5 P4.3@244.09,3345.5 P4.3@250,3345.5 ; P9.3@223.33,821.92 ccw(c173.19,771.78) 173.19,842.69 ccw(c173.19,913.59) P9.3@223.33,863.46 ; P8.3@223.33,1322.48 ccw(c173.19,1272.35) 173.19,1343.25 ccw(c173.19,1414.16) P8.3@223.33,1364.02 ; P7.3@223.33,1823.05 ccw(c173.19,1772.91) 173.19,1843.81 ccw(c173.19,1914.72) P7.3@223.33,1864.58 ; P6.3@223.33,2323.61 ccw(c173.19,2273.47) 173.19,2344.38 ccw(c173.19,2415.28) P6.3@223.33,2365.14 ; P5.3@223.33,2824.17 ccw(c173.19,2774.03) 173.19,2844.94 ccw(c173.19,2915.84) P5.3@223.33,2865.71 ; P4.3@223.33,3324.73 ccw(c173.19,3274.59) 173.19,3345.5 ccw(c173.19,3416.41) P4.3@223.33,3366.27 ; P10.3@244.09,342.13 337.13,342.13 361.26,366.26 D18.3@415,366.26 419.5,361.76 881.76,361.76 960,440 R18.2@1358,440 ; P10.3@264.86,321.36 cw(c315,271.22) 315,342.13 cw(c315,413.03) P10.3@264.86,362.89 ; U6.1@1207,4015.89 1319.11,4015.89 v1@1350,3985
  Top Layer w60: P3.3@244.09,3836.69 cw(c244.09,3761.04) 297.59,3814.53 ; P3.3@250.72,3852.69 ccw(c329.64,3931.61) 329.64,3820 ; P3.3@253.05,3848.83 ccw(c292.12,3860.9) 292.12,3820 ; P3.3@266.06,3846.06 292.13,3820 v2(585,3820)
  Top Layer w70: P10.3@250,342.13 P10.3@244.09,342.13 137.87,342.13 100,380 100,790 100,1390 100,2140 100,2590 100,3640 100,3780 166.06,3846.06 P3.3@244.09,3846.06 P3.3@266.06,3846.06
  Bottom Layer w20: 1275,3905 1277.5,3907.5
  Bottom Layer w60: v2(585,3820) 670,3905 1275,3905 ; 1280,3905 1375,4000 U14.9@1590,4000
  other v1: 95,340 95,490 95,640 95,790 95,940 95,1090 95,1240 95,1390 95,1540 95,1690 95,1840 95,1990 95,2140 95,2290 95,2440 95,2590 95,2740 95,2890 95,3040 95,3190 95,3340 95,3490 95,3640 95,3790 1353.26,3985
PTX_R: R8.2 U7.3 | length 3195.6
  Top Layer w20: v1(2090,340) 2100,340 2120,360 R8.2@2120,403 ; v1@2090,341 ccw(c2090,367.56) 2108.78,348.78
  Bottom Layer w20: v3(850,2255) 850,445 955,340 v1(2090,340)
PTX_RSOURCE: Q2.2 U3.3 | length 1610.6
  Top Layer w20: v2(685,3295) U3.3@809.27,3295 ; v2@690.3,3289.7 cw(c703.11,3276.89) 703.11,3295 cw(c703.11,3313.11) v2@690.3,3300.3 ; v1(815,3755) 975,3915 1395,3915 1430,3950 1450,3970 1450,4106.34 Q2.2@1477.4,4133.74 ; Q2.2@1462.55,4118.89 cw(c1477.4,4104.03) Q2.2@1477.4,4125.04
  Bottom Layer w20: v2@679.7,3300.3 ccw(c666.89,3313.11) 685,3313.11 ccw(c703.11,3313.11) v2@690.3,3300.3 ; v2(685,3295) 685,3625 v1(815,3755)
RATIO_A: R5.1 R6.1 R12.1 U4.6 | length 391.6
  Top Layer w10: U4.6@1939.2,545.59 R5.1@2068.59,545.59 ; 2050.28,545.59 ccw(c2050.28,570.22) R5.1@2067.7,552.8 ; 2059.5,545.59 cw(c2059.5,534) R5.1@2067.7,542.2 ; R5.1@2067.7,557.8 ccw(c2054.89,570.61) 2073,570.61 ccw(c2091.11,570.61) R5.1@2078.3,557.8 ; R6.1@2067.7,602.2 cw(c2054.89,589.39) 2073,589.39 cw(c2091.11,589.39) R6.1@2078.3,602.2 ; R6.1@2067.7,617.8 ccw(c2054.89,630.61) 2073,630.61 ccw(c2091.11,630.61) R6.1@2078.3,617.8 ; R12.1@2067.7,662.2 cw(c2054.89,649.39) 2073,649.39 cw(c2091.11,649.39) R12.1@2078.3,662.2 ; R5.1@2073,550 R6.1@2073,610 R12.1@2073,670
RATIO_B: R10.1 U2.9 U4.7 | length 1083.4
  Top Layer w10: U4.7@1939.2,571.18 1996.18,571.18 v1(2015,590) 2030,605 2030,815 2060,845 R10.1@2060,903 ; v1@2009,590 cw(c1994.51,590) 2004.76,579.76 cw(c2015,569.51) v1@2015,584 ; R10.1@2054.7,897.7 cw(c2041.89,884.89) 2060,884.89 cw(c2078.11,884.89) R10.1@2065.3,897.7
  Bottom Layer w10: v1@2015,584 cw(c2015,569.51) 2025.24,579.76 cw(c2035.49,590) v1@2021,590 ; v1(2015,590) 2080,525 2405,525 2445,565 U2.9@2445,630 ; U2.9@2434.62,619.62 cw(c2409.55,594.55) 2445,594.55 cw(c2480.45,594.55) U2.9@2455.38,619.62
RST: C30.1 R23.2 U10.7 | length 324.8
  Top Layer w10: R23.2@2920,2543 C30.1@2980,2543 3035.16,2487.84 U10.7@3035.16,2386.42 ; R23.2@2927.8,2537.7 cw(c2940.61,2524.89) 2940.61,2543 cw(c2940.61,2561.11) R23.2@2927.8,2548.3 ; C30.1@2972.2,2537.7 ccw(c2959.39,2524.89) 2959.39,2543 ccw(c2959.39,2561.11) C30.1@2972.2,2548.3 ; C30.1@2982.5,2535.5 cw(c2982.5,2523.43) C30.1@2991.04,2531.96 ; C30.1@2990,2543 ccw(c3014.14,2543) 2997.07,2525.93
TRST: P11.3
TSWDO: P11.4
VCC_BUS: B3.1 P11.1 | length 346.5
  Top Layer w30: P11.1@3809.73,1654.73 cw(c3760.79,1605.79) 3830,1605.79 ; P11.1@3820,1665 3830,1655 B3.1@3830,1377
VREF: R11.2 R16.2 R19.1 U4.13 U4.14 | length 1542.5
  Top Layer w10: 1522.97,606.41 ccw(c1522.97,626.53) R16.2@1537.2,612.3 ; 1525.82,606.41 cw(c1525.82,590.32) R16.2@1537.2,601.7 ; R19.1@1527.7,1042.2 cw(c1514.89,1029.39) 1533,1029.39 cw(c1551.11,1029.39) R19.1@1538.3,1042.2 ; R19.1@1533,1055 1533,962 1547,948 1547,606.41 1505,606.41 1492,593.41 1492,374.41 1537,329.41 1607,329.41 ; R16.2@1542.2,612.3 ccw(c1530.6,623.9) 1547,623.9 ; 1547,626.31 ccw(c1566.81,626.31) R16.2@1552.8,612.3 ; U4.14@1714.8,417.64 1660.23,417.64 1647,404.41 ; U4.13@1714.8,443.23 1653.23,443.23 1647,437 1647,404.41 ; R11.2@1872.7,269.7 ccw(c1859.89,256.89) 1859.89,275 ccw(c1859.89,293.11) R11.2@1872.7,280.3 ; R11.2@1878,275 1661.41,275 1607,329.41 ; 1607,329.41 1647,369.41 1647,404.41
pads on no net: D19.2 D20.2 P11.2 U2.3 U2.4 U2.5 U10.41 U10.42 U10.43 U14.3 U14.4 U14.5

## Polygon pours and split planes (outlines as drawn)
AGND on Top Layer "Top Layer-No Net" (solid, pour order 1000): 2250,4250 2250,250 0,250 0,4250
GROUND on Top Layer "Top Layer-No Net" (solid, pour order 1000): 0,4488.19 0,4290 6102.36,4290 6102.36,4488.19
GROUND on Top Layer "Top Layer-No Net" (solid, pour order 1001): 0,198.19 0,0 6102.36,0 6102.36,198.19
2GND on Top Layer "Top Layer-No Net" (solid, pour order 1011): 4245,3845 4245,2750 5425,2750 5425,3845
GND on Top Layer "Top Layer-No Net" (solid, pour order 1003): 4200,4250 4200,250 2600,250 2600,4250
AGND on Bottom Layer "Top Layer-No Net" (solid, pour order 1001): 2250,4250 2250,250 0,250 0,4250
GND on Bottom Layer "Top Layer-No Net" (solid, pour order 1003): 4200,4250 4200,250 2600,250 2600,4250
GROUND on Bottom Layer "Top Layer-No Net" (solid, pour order 1008): 6102.36,4488.19 6102.36,4290 0,4290 0,4488.19
GROUND on Bottom Layer "Top Layer-No Net" (solid, pour order 1009): 6102.36,198.19 6102.36,0 0,0 0,198.19
2GND on Bottom Layer "Top Layer-No Net" (solid, pour order 1011): 4245,3845 4245,2750 5425,2750 5425,3845

## Keep-outs
Keep-Out Layer:
  the board outline again, w10

## Other copper
Top Layer:
  rectangle net GROUND: 6045,160 6090,4380
  rectangle net PTX_B2: 20,305 180,3880
Bottom Layer:
  rectangle net GROUND: 2280,3325 2565,4335
  rectangle net PTX_B2: 20,305 180,3880

## Silkscreen, mask and mechanical layers (free items; w line width, h text height)
Top Overlay:
  lines w10: 590,412.13 831.06,412.13 ; 590,572.13 826.06,572.13 ; 590,1413.25 831.06,1413.25 ; 590,1573.25 826.06,1573.25 ; 590,3916.06 831.06,3916.06 ; 590,4076.06 826.06,4076.06 ; 831.06,252.13 590,252.13 590,732.13 831.06,732.13 ; 831.06,253.19 831.06,732.13 ; 831.06,1254.31 831.06,1733.25 ; 831.06,3757.13 831.06,4236.06 ; 933.94,252.13 933.94,732.13 831.06,732.13 ; 831.06,1733.25 590,1733.25 590,1253.25 831.06,1253.25 933.94,1253.25 933.94,1733.25 831.06,1733.25 ; 831.06,4236.06 590,4236.06 590,3756.06 831.06,3756.06 933.94,3756.06 933.94,4236.06 831.06,4236.06
  text "PWR" at 5130,4175 h60
  text "PT_R" at 640,4125 h60
  text "24V" at 5540,4101.85 h100
  text "PT_B1" at 640,3980 h60
  text "GND" at 5540,3951.85 h100
  text "PT1" at 910,3940 h80 r90
  text "PT_B2" at 640,3835 h60
  text "485A+" at 5540,3805.18 h100
  text "PT1" at 307.19,3765 h80
  text "485B-" at 5540,3658.52 h100
  text "485G" at 5540,3511.85 h100
  text "485G" at 5540,3298.05 h100
  text "PT2" at 312.19,3265 h80
  text "485B-" at 5540,3150.76 h100
  text "485A+" at 5540,3003.47 h100
  text "GND" at 5540,2856.18 h100
  text "PT3" at 317.19,2765 h80
  text "PA5" at 2650,2765 h60
  text "24V" at 5540,2707.68 h100
  text "PT4" at 322.19,2260 h80
  text "PT5" at 307.19,1755 h80
  text "PT_R" at 640,1622.19 h60
  text "PT_B1" at 640,1477.19 h60
  text "PT6" at 910,1437.19 h80 r90
  text "PT_B2" at 640,1332.19 h60
  text "PTXC8S2" at 4345,815 h250
  text "V2.0" at 5365,813.89 h150
  text "PT7" at 307.19,765 h80
  text "PT_R" at 640,621.06 h60
  text "2018-10-12" at 4340,585 h200
  text "PT_B1" at 640,476.06 h60
  text "PT8" at 910,436.06 h80 r90
  text "PT_B2" at 640,331.06 h60
Top Solder:
  rectangle: 0,4290 6102.36,4488.19
  rectangle: 0,0 6102.36,198.19
Bottom Solder:
  rectangle: 0,4290 6102.36,4488.19
  rectangle: 0,0 6102.36,198.19

## Dimensions
5811.02,4229.33 to 6102.36,4488.19 on Top Overlay
5858.27,3838.58 to 6102.36,4488.19 on Top Overlay
6173.23,4229.33 to 6102.36,4488.19 on Top Overlay
0,0 to 0,4488.19 on Top Overlay
-70.87,300 to 0,0 on Top Overlay
-70.87,4236.06 to 0,4488.19 on Top Overlay

## Text inside footprints (layer, text, board x,y; h text height)
P11: Top Overlay "2" at 3740,1475 h59.06 r90; Top Overlay "1" at 3845,1490 h59.06 r90; Top Overlay "10" at 3725,2205 h59.06 r90; Top Overlay "9" at 3855,2230 h59.06 r90
U2: Top Overlay "12" at 2705,654 h60 r180; Top Overlay "1" at 2708,847 h60 r180
U14: Top Overlay "12" at 1614,3740 h60 r90; Top Overlay "1" at 1807,3737 h60 r90